# Altium PCB ATS_Unit.PcbDoc
Units mm, origin at the board's own origin, x right, y up, seen from the top; angles counter-clockwise.
Board outline 113 x 55 mm, 2 copper layers (Top Layer, Bottom Layer); 61 components, 50 nets, 316 pads, 298 vias.
Unrouted connection lines stored in the file: 3.
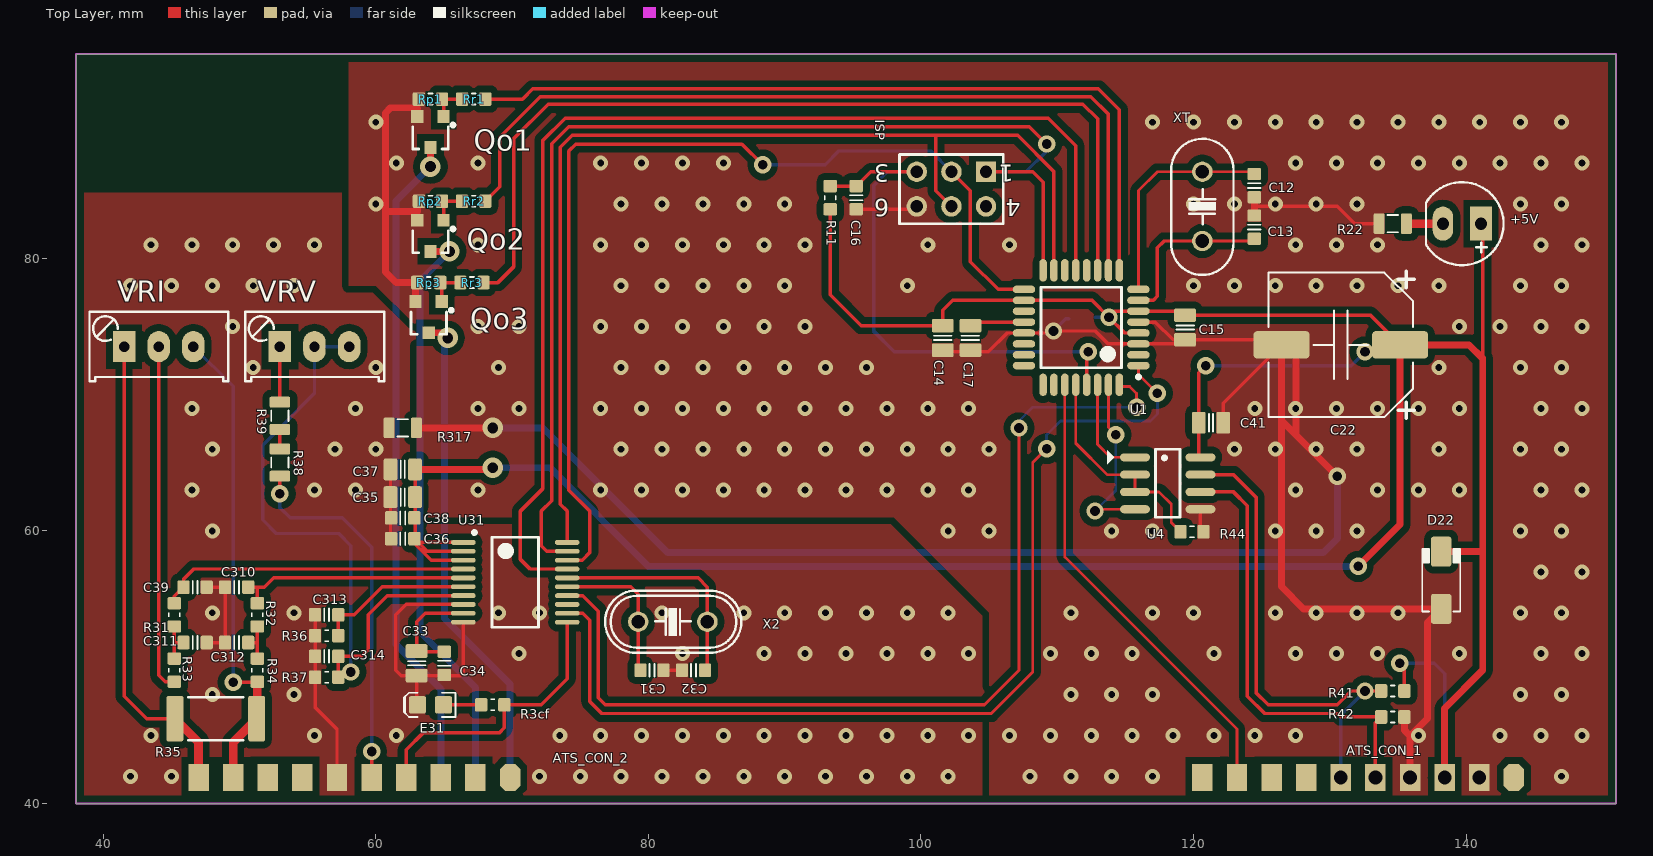
[diagram p0: Top Layer view]
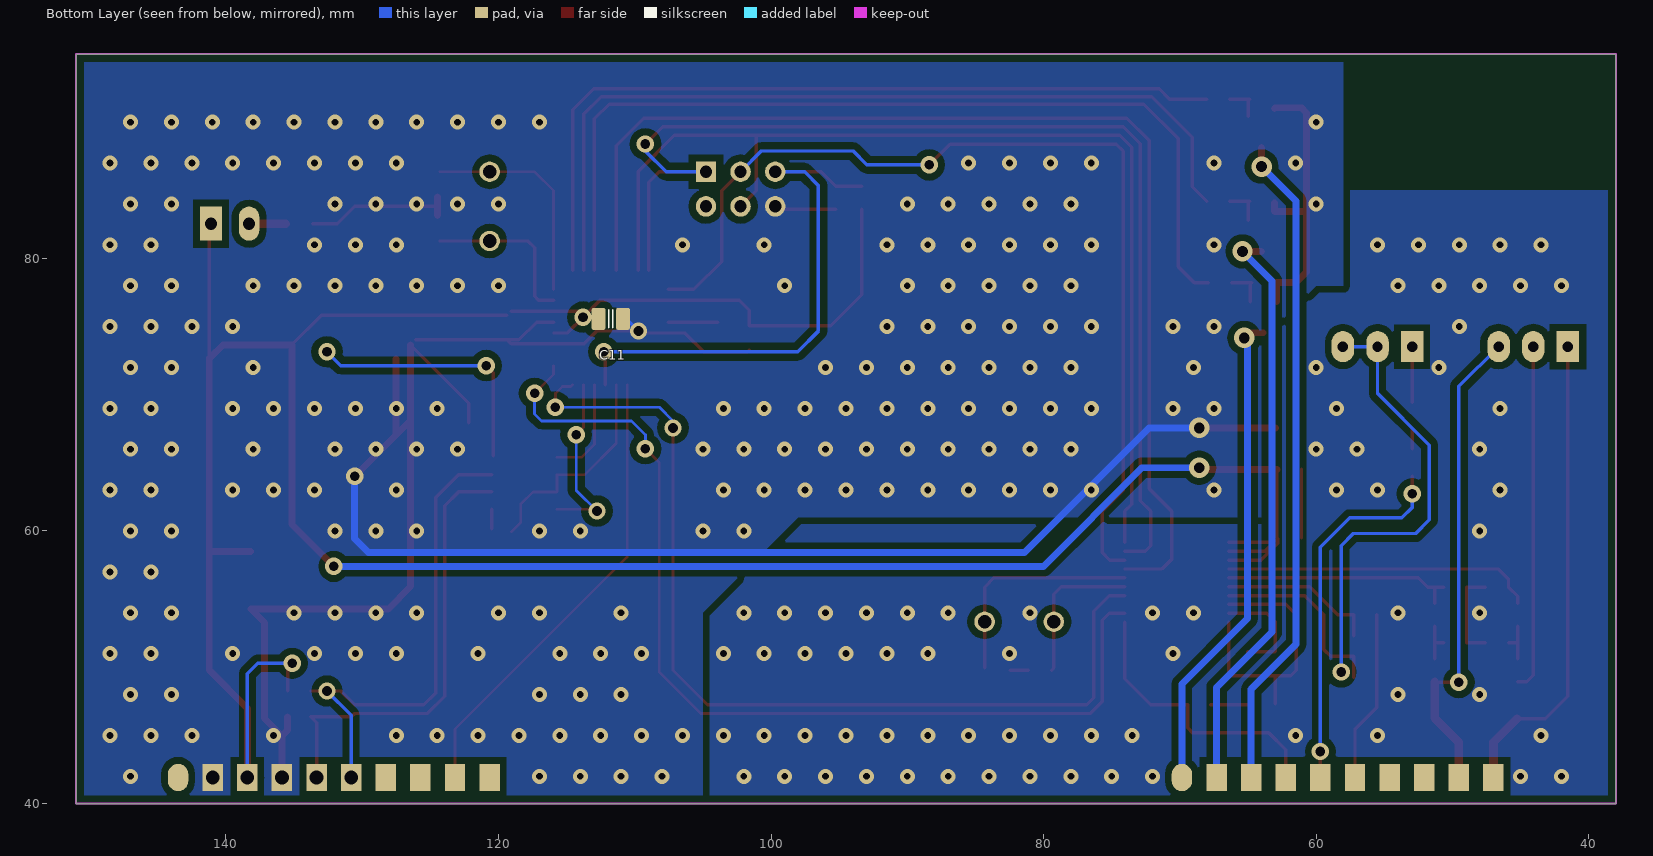
[diagram p1: Bottom Layer view, seen from below]
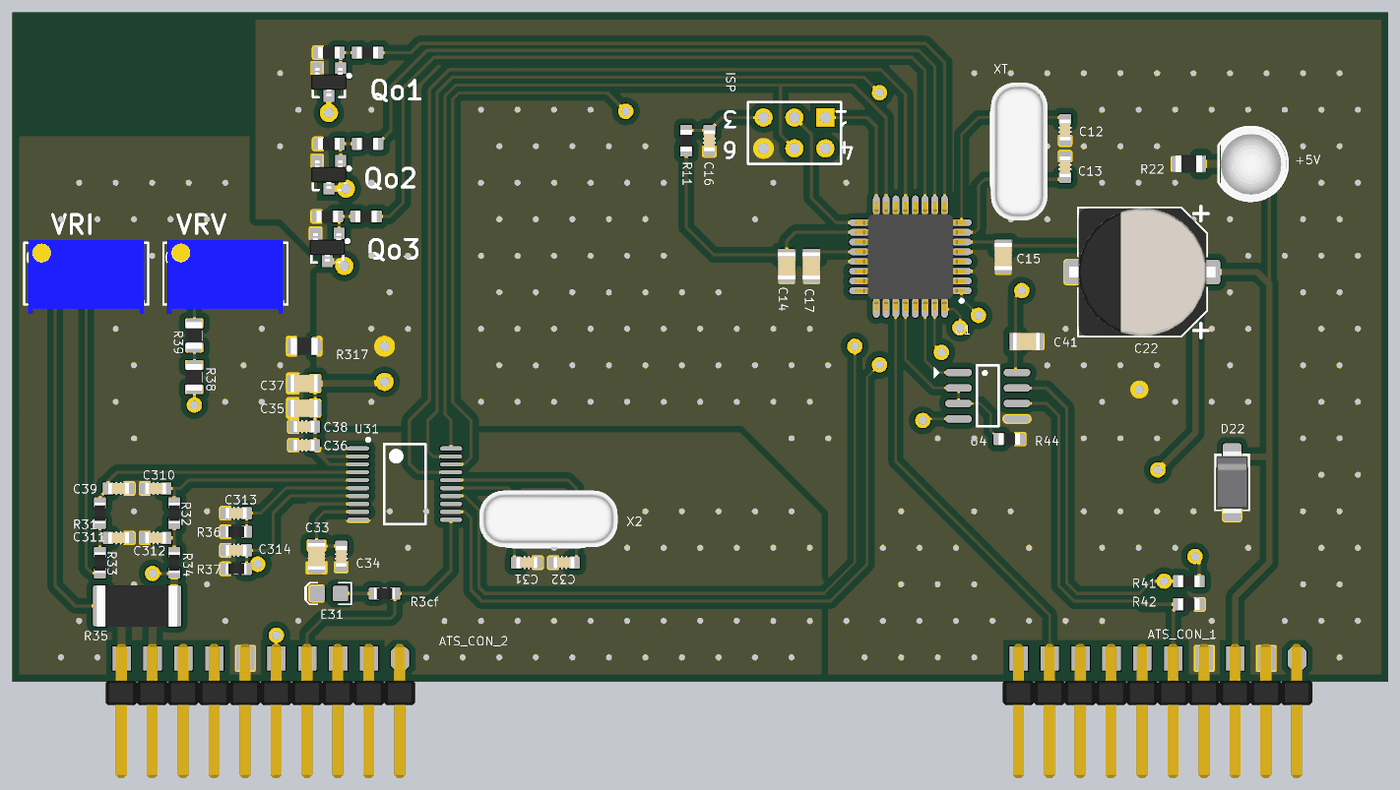
[diagram p2: 3D render of the assembled board from above, using the file's embedded part models]

## Layer stack, top to bottom
Top Solder: solder mask 0.0102, Solder Resist, Dk 3.5
Top Layer: signal copper 0.0356
Dielectric 1: dielectric 0.32, FR-4, Dk 4.8
Bottom Layer: signal copper 0.0356
Bottom Solder: solder mask 0.0102, Solder Resist, Dk 3.5

## Board outline
38,40 151,40 151,95 38,95

## Design rules (kind name [scope] priority, off if disabled: settings)
Clearance [All] p1: gap=0.254 except(0.203: Arc-SMDPad Track-SMDPad SMDPad-SMDPad; 0.508: Arc-Poly Track-Poly SMDPad-Poly THPad-Poly Via-Poly Fill-Poly Poly-Poly)
PlaneConnect [All] p1: planeconnectstyle=Direct reliefexpansion=0.508 reliefentries=4 reliefconductorwidth=0.254 reliefairgap=0.254
PolygonConnect [All] p1: connectstyle=Direct reliefconductorwidth=0.254 reliefentries=4 polygonreliefangle="90 Angle" airgapwidth=0.254
RoutingVias [All] p1: holewidth=0.8 width=1.2 viastyle="Through Hole" minholewidth=0.5 minwidth=1.1 maxholewidth=5 maxwidth=5
SolderMaskExpansion [All] p1: expansion=0.102
Width [All] p1: maxlimit=1.27 minlimit=0.203 preferedwidth=0.635
29 further rules are at their usual default settings.

## Components (designator, comment, footprint, x,y, rotation, side; value= is the part's Value field where it differs from the comment)
+5V "Led" "LED 5mm RED" 139.7,82.55 r180 top
ATS_CON_1 "Header 10X2A" OMC10 143.51,41.91 r180 top
ATS_CON_2 "Header 10X2A" OMC10 69.85,41.91 r180 top
C11 "Cap" CAPC2012N_F#1 111.76,75.565 r180 bottom
C12 "CAP NP" CAPC1608N 124.46,85.344 r270 top
C13 "CAP NP" CAPC1608N 124.46,82.296 r90 top
C14 "Cap" CAPC2012N_F#2 101.6,74.168 r270 top
C15 "Cap" CAPC2012N_F#2 119.38,74.93 r270 top
C16 "CAP NP" CAPC1608N 95.25,84.455 r90 top
C17 "Cap" CAPC2012N_F#2 103.632,74.168 r270 top
C22 "2200uF/35V" CAP_ELEC_SIZE_G 130.81,73.66 r90 top
C31 "CAP NP" CAPC1608N 80.264,49.784 r180 top
C32 "CAP NP" CAPC1608N 83.312,49.784 r0 top
C33 "Cap" CAPC2012N_F#3 62.992,50.292 r270 top
C34 "CAP NP" CAPC1608N 65.024,50.292 r90 top
C35 "Cap" CAPC2012N_F#3 61.976,62.484 r180 top
C36 "CAP NP" CAPC1608N 61.976,59.436 r0 top
C37 "Cap" CAPC2012N_F#3 61.976,64.516 r180 top
C38 "CAP NP" CAPC1608N 61.976,60.96 r0 top
C39 "CAP NP" CAPC1608N 46.736,55.88 r180 top
C41 "100nF/104" CAPC2012N_F#2 121.285,67.945 r180 top
C310 "CAP NP" CAPC1608N 49.784,55.88 r0 top
C311 "CAP NP" CAPC1608N 46.736,51.816 r180 top
C312 "CAP NP" CAPC1608N 49.784,51.816 r0 top
C313 "CAP NP" CAPC1608N 56.388,53.848 r0 top
C314 "CAP NP" CAPC1608N 56.388,50.8 r0 top
D22 "Diode" DO-214AC 138.176,56.388 r90 top
E31 "Blue" LED-0805-K 64.008,47.244 r180 top
ISP "Header 3X2A" HDR2X3_CEN 104.775,86.36 r180 top
Qo1 "C828" "SOT23 TOP" 64.008,89.281 r180 top
Qo2 "C828" "SOT23 TOP" 64.008,81.661 r180 top
Qo3 "C828" "SOT23 TOP" 63.881,75.692 r180 top
R3cf "Res" 0603ESDA 68.58,47.244 r180 top
R11 "Res" RESC1608N_ZERO 93.345,84.455 r270 top
R22 "Res_0805_1k" RESC2012N_F#1 134.62,82.55 r180 top
R31 "Res" 0603ESDA 45.212,53.848 r90 top
R32 "Res" 0603ESDA 51.308,53.848 r90 top
R33 "Res" 0603ESDA 45.212,49.784 r90 top
R34 "Res" 0603ESDA 51.308,49.784 r90 top
R35 "0.002R" RESC6332N 48.26,46.228 r180 top
R36 "Res" 0603ESDA 56.388,52.324 r0 top
R37 "Res" 0603ESDA 56.388,49.276 r0 top
R38 "Res" RESC2012N_F#2 52.959,65.024 r90 top
R39 "Res" RESC2012N_F#2 52.959,68.453 r90 top
R41 "1k" RESC1608N_ZERO 134.62,48.26 r0 top
R42 "1k" RESC1608N_ZERO 134.62,46.355 r180 top
R44 "330R" RESC1608N_ZERO 119.888,59.944 r180 top
R317 "Res" RESC2012N_F#2 61.976,67.564 r180 top
Rp1 "Res" RESC1608N_ZERO 64.008,91.694 r0 top
Rp2 "Res" RESC1608N_ZERO 64.008,84.201 r0 top
Rp3 "Res" RESC1608N_ZERO 63.881,78.232 r0 top
Rr1 "Res" RESC1608N_ZERO 67.183,91.694 r180 top
Rr2 "Res" RESC1608N_ZERO 67.183,84.201 r180 top
Rr3 "Res" RESC1608N_ZERO 67.056,78.232 r180 top
U1 "ATmega88PA" 32PIN 111.76,74.93 r180 top
U4 "MAX485" SO-8 118.11,63.5 r0 top
U31 "ADE7753" TSSOP-20 70.231,56.236 r0 top
VRI "1K" VR1 41.529,73.533 r0 top
VRV "100K" VR1 52.959,73.533 r0 top
X2 "3.5795Mhz" XT2 81.788,53.34 r180 top
XT "16MHz" XT2 120.65,83.82 r90 top

## Footprints (in the part's own frame and the unit in brackets; to place one, negate y for a bottom-side part, rotate by r counter-clockwise, add the part's x,y. Pads: shape width x height; smd on the part's side, far side on the other; paste and mask are expansions set on the pad)
32PIN [mm]
  oval 1.65x0.55 smd: 1(-4.2,2.8) 2(-4.2,2) 3(-4.2,1.2) 4(-4.2,0.4) 5(-4.2,-0.4) 6(-4.2,-1.2) 7(-4.2,-2) 8(-4.2,-2.8) 17(4.2,-2.8) 18(4.2,-2) 19(4.2,-1.2) 20(4.2,-0.4) 21(4.2,0.4) 22(4.2,1.2) 23(4.2,2) 24(4.2,2.8)
  oval 0.55x1.65 smd: 9(-2.8,-4.2) 10(-2,-4.2) 11(-1.2,-4.2) 12(-0.4,-4.2) 13(0.4,-4.2) 14(1.2,-4.2) 15(2,-4.2) 16(2.8,-4.2) 25(2.8,4.2) 26(2,4.2) 27(1.2,4.2) 28(0.4,4.2) 29(-0.4,4.2) 30(-1.2,4.2) 31(-2,4.2) 32(-2.8,4.2)
  silkscreen extent -4.33,-2.95 2.95,3.75, body extent -4.5,-4.5 4.5,4.5, height 1.6
0603ESDA [mm] "Chip ESD suppressor, Body 1.6x0.8mm, 0603, IPC Medium Density"
  round 0.254 on Mech14: 0(0,0)
  rrect25% 0.9x1 smd: 1(-0.85,0) 2(0.85,0)
  Top Layer pour cut-out: -0.4,0.6 0.4,0.6 0.4,-0.6 -0.4,-0.6
  silkscreen extent -0.15,-0.41 0.15,0.41, body extent -0.85,-0.45 0.85,0.45, height 0.79
CAP_ELEC_SIZE_G [mm] "Capacitor, polarized, aluminum can; 10.0x10.2mm DxH"
  round 0.635 on Mech14: 0(0,0)
  rrect25% 2x4.1 smd: 1(0,-4.35) 2(0,4.35)
  silkscreen extent -5.4,-5.4 5.4,5.3, body extent -5.25,-6 5.25,6, height 10.5
CAPC1608N [mm] "Chip Capacitor, Body 1.6x0.8mm, 0603, IPC Medium Density"
  round 0.254 on Mech14: 0(0,0)
  rrect25% 0.9x1 smd: 1(-0.85,0) 2(0.85,0)
  Top Layer pour cut-out: -0.4,0.6 0.4,0.6 0.4,-0.6 -0.4,-0.6
  silkscreen extent -0.18,-0.48 0.18,0.48, body extent -0.85,-0.45 0.85,0.45, height 0.89
CAPC2012N_F#1 [mm] "Chip Capacitor, Body 2.0x1.2mm, 0805, IPC Medium Density, for Flex circuits"
  round 0.254 on Mech14: 0(0,0)
  rrect25% 1.2x1.4 on Bottom Solder: 1(-0.9,0) 1(0.9,0)
  rrect25% 1x1.6 smd paste-1: 1(-0.9,0) 2(0.9,0)
  rrect25% 1x1.4 on Bottom Paste: 1(-0.9,0) 1(0.9,0)
  Top Layer pour cut-out: -0.4,0.8 0.4,0.8 0.4,-0.8 -0.4,-0.8
  silkscreen extent -0.15,-0.65 0.15,0.65, body extent -1.1,-0.72 1.1,0.73, height 1.34
CAPC2012N_F#2 [mm] "Chip Capacitor, Body 2.0x1.2mm, 0805, IPC Medium Density, for Flex circuits"
  round 0.254 on Mech14: 0(0,0)
  rrect25% 1.2x1.4 on Top Solder: 1(-0.9,0) 1(0.9,0)
  rrect25% 1x1.6 smd paste-1: 1(-0.9,0) 2(0.9,0)
  rrect25% 1x1.4 on Top Paste: 1(-0.9,0) 1(0.9,0)
  Top Layer pour cut-out: -0.4,0.8 0.4,0.8 0.4,-0.8 -0.4,-0.8
  silkscreen extent -0.15,-0.65 0.15,0.65, body extent -1.1,-0.72 1.1,0.73, height 1.34
CAPC2012N_F#3 [mm] "Chip Capacitor, Body 2.0x1.2mm, 0805, IPC Medium Density, for Flex circuits"
  round 0.254 on Mech14: 0(0,0)
  rrect50% 1.2x1.4 on Top Solder: 1(-0.9,0) 1(0.9,0)
  rrect25% 1x1.6 smd paste-1: 1(-0.9,0) 2(0.9,0)
  rrect50% 1x1.4 on Top Paste: 1(-0.9,0) 1(0.9,0)
  Top Layer pour cut-out: -0.4,0.8 0.4,0.8 0.4,-0.8 -0.4,-0.8
  silkscreen extent -0.15,-0.65 0.15,0.65, body extent -1.1,-0.72 1.1,0.73, height 1.34
DO-214AC [mm] "JEDEC DO214 variation AC. SMA"
  round 0.508 on Mech14: 0(0,0)
  rrect25% 2.2x1.5 smd: A(-2.1,0) K(2.1,0)
  silkscreen extent -2.3,-1.4 2.3,1.4, body extent -2.6,-1.3 2.6,1.3, height 2.42
HDR2X3_CEN [mm] "Connector; Header; 3x2 Position"
  rect 1.5x1.5 hole 0.9: 1(0,0)
  round 1.5 hole 0.9: 2(2.54,0) 3(5.08,0) 4(0,2.54) 5(2.54,2.54) 6(5.08,2.54)
  silkscreen extent -1.27,-1.27 6.35,3.81
"LED 5mm RED" [mm]
  rect 1.6x2.5 hole 0.9: A(-1.397,0)
  oval 1.5x2.5 hole 0.9: K(1.397,0)
  silkscreen extent -3.04,-3.05 2.64,3.04, body extent -2.94,-2.97 2.48,3.05, height 12.31
LED-0805-K [mil]
  round 20 on Mech14: 0(0,0)
  rrect25% 50x50 smd: A(-37.5,0) K(37.5,0)
  Top Layer pour cut-out: -15,30 15,30 15,-30 -15,-30
  silkscreen extent -72,-35 77,35, body extent -39,-25 39,25, height 31
OMC10 [mm]
  oct 1.5x2 smd: 1(0,0)
  rect 1.5x2 smd: 2(2.54,0) 3(5.08,0) 4(7.62,0) 5(10.16,0) 6(12.7,0) 7(15.24,0) 8(17.78,0) 9(20.32,0) 10(22.86,0)
  oval 1.5x2 smd far side: 11(0,0)
  rect 1.5x2 smd far side: 12(2.54,0) 13(5.08,0) 14(7.62,0) 15(10.16,0) 16(12.7,0) 17(15.24,0) 18(17.78,0) 19(20.32,0) 20(22.86,0)
  body extent -1.24,-1.18 24.16,9.82, height 2.33
RESC1608N_ZERO [mm] "Chip Resistor, Body 1.6x0.8mm, 0603, IPC Medium Density"
  round 0.254 on Mech14: 0(0,0)
  rrect25% 0.9x1 smd: 1(-0.85,0) 2(0.85,0)
  Top Layer pour cut-out: -0.4,0.6 0.4,0.6 0.4,-0.6 -0.4,-0.6
  silkscreen extent -0.15,-0.41 0.15,0.41, body extent -0.87,-0.47 0.88,0.48, height 0.54
RESC2012N_F#1 [mm] "Chip Resistor, Body 2.0x1.2mm, 0805, IPC Medium Density"
  round 0.254 on Mech14: 0(0,0)
  rrect25% 1x1.3 on Top Solder: 1(-1,0) 1(1,0)
  rrect25% 0.8x1.5 smd paste-1: 1(-1,0) 2(1,0)
  rrect25% 0.8x1.3 on Top Paste: 1(-1,0) 1(1,0)
  Top Layer pour cut-out: -0.6,0.75 0.6,0.75 0.6,-0.75 -0.6,-0.75
  silkscreen extent -0.38,-0.64 0.38,0.64, body extent -1.1,-0.67 1.1,0.68, height 0.69
RESC2012N_F#2 [mm] "Chip Resistor, Body 2.0x1.2mm, 0805, IPC Medium Density"
  round 0.254 on Mech14: 0(0,0)
  rrect50% 1x1.3 on Top Solder: 1(-1,0) 1(1,0)
  rrect25% 0.8x1.5 smd paste-1: 1(-1,0) 2(1,0)
  rrect50% 0.8x1.3 on Top Paste: 1(-1,0) 1(1,0)
  Top Layer pour cut-out: -0.6,0.75 0.6,0.75 0.6,-0.75 -0.6,-0.75
  silkscreen extent -0.38,-0.64 0.38,0.64, body extent -1.1,-0.67 1.1,0.68, height 0.69
RESC6332N [mm] "Chip Resistor, Body 6.3x3.2mm, 2512, IPC Medium Density"
  round 1 on Mech14: 0(0,0)
  rrect25% 1.25x3.35 smd: 1(-3,0) 2(3,0)
  silkscreen extent -2,-1.58 2,1.58, body extent -3.3,-1.7 3.3,1.7, height 0.69
SO-8 [mm] "8-Pin Small Outline Integrated Circuit 1.27 mm Pitch, IPC Medium Density"
  oval 2.2x0.6 smd: 1(-2.4,1.905) 2(-2.4,0.635) 3(-2.4,-0.635) 4(-2.4,-1.905) 5(2.4,-1.905) 6(2.4,-0.635) 7(2.4,0.635) 8(2.4,1.905)
  silkscreen extent -4.44,-2.5 0.9,2.5, body extent -1.95,-2.45 1.95,2.45, height 1.75
"SOT23 TOP" [mm]
  rect 0.9x0.95 smd: 1(-0.965,-1.143) 2(0,1.143) 3(0.965,-1.143)
  silkscreen extent -1.77,-0.63 1.3,1.25, body extent -1.46,-1.17 1.46,1.17, height 1
TSSOP-20 [mm] "TSOP, 20-Leads, Body 6.5x4.4mm, Pitch 0.65mm, IPC Low Density"
  oval 1.8x0.35 smd: 1(-3.81,2.925) 2(-3.81,2.275) 3(-3.81,1.625) 4(-3.81,0.975) 5(-3.81,0.325) 6(-3.81,-0.325) 7(-3.81,-0.975) 8(-3.81,-1.625) 9(-3.81,-2.275) 10(-3.81,-2.925) 11(3.81,-2.925) 12(3.81,-2.275) 13(3.81,-1.625) 14(3.81,-0.975) 15(3.81,-0.325) 16(3.81,0.325) 17(3.81,0.975) 18(3.81,1.625) 19(3.81,2.275) 20(3.81,2.925)
  silkscreen extent -3.12,-3.3 1.7,3.77, body extent -2.25,-3.3 2.25,3.3, height 1.2
VR1 [mil] "Variable Resistor"
  rect 65x90 hole 30: 1(0,0)
  oval 65x90 hole 30: 2(100,0) 3(200,0)
  silkscreen extent -100,-100 301,100, body extent -88,-130 288,110, height 455
XT2 [mm] "Footpin for Crystal 2 pin"
  round 1.5 hole 1: 1(-2.54,0) 2(2.54,0)
  silkscreen extent -5.03,-2.29 4.96,2.29, body extent -5.93,-2.36 5.42,2.29, height 3.5

## Part data
ATS_CON_1 ATS_CON_2: "Header, 10-Pin, Dual row"
C22: library part CP4, "Cap 1000uF/16V - 220uF/50V"
C41: library part "CAP NP"
E31: library part LED_SMD_Blue_0805_100mcd, "LED 0805 SMD Blue 100mcd 470nm"
ISP: "Header, 3-Pin, Dual row"
Qo1 Qo2 Qo3: library part NPN, "Transistor C828 C1815...."
R22: library part Res
R35: library part R, "Resistor 1/4W"
R41 R42 R44: library part Res, "Tro dan"
U1: library part ATmega48/168/328, "ATmega48/168/328"
U4: "RS232 - RS485 (Same sn75176)"
U31: "Single-Phase Multifunction Metering IC with di/dt Sensor Interface"
VRI VRV: library part VR, "Var Resistor"
X2: library part XT2, "Crystal For all Crystal 2pin."
XT: library part Crystal

## Via types
v1: diameter 1.1, hole 0.5, Top Layer to Bottom Layer, tented both sides, 267 vias
v2: diameter 1.27, hole 0.711, Top Layer to Bottom Layer, 21 vias
v3: diameter 1.5, hole 0.8, Top Layer to Bottom Layer, 5 vias
v4: diameter 1.5, hole 1, Top Layer to Bottom Layer, 5 vias

## Nets (pads, with @x,y where several pads share a name; then routed paths per layer and width w, separated by ;. In a path a pad name is that pad's centre, name@x,y a point inside that pad or via, vN(x,y) a via of type N, cw(c..) or ccw(c..) an arc to the next point about the centre after c; other vN are vias at no path point)
+3V3: ATS_CON_1.7 ATS_CON_1.17
+5V: +5V.A ATS_CON_1.3 ATS_CON_1.13 C11.1@112.66,75.565 C14.1@101.6,75.068 C15.1@119.38,75.83 C22.1 C35.1@62.876,62.484 C36.2 C37.1@62.876,64.516 C38.2 C41.2 D22.K R11.2 R41.2 U1.4 U1.6 U1.18 U4.8 U31.1 U31.2 U31.3 | length 245.6
  Top Layer w0.254: C36.2@62.876,59.486 62.876,62.484 C37.1@62.876,64.516 ; U31.3 64.059,57.861 62.826,59.094 C36.2 C36.2@63.101,59.161 ; U31.2 63.751,58.511 C36.2@63.101,59.161 ; U31.1 C36.2@63.101,59.161 ; R11.2 93.345,77.343 95.62,75.068 101.6,75.068 101.6,76.2 102.33,76.93 U1.18 112.554,76.93 v2(113.792,75.692) ; U1.4 114.954,74.53 v2(113.792,75.692) ; C15.1@119.08,76.13 U1.6 114.23,76.13 v2(113.792,75.692) ; C15.1@119.38,75.83 132.99,75.83 C22.1 ; U4.8@120.385,65.53 C41.2 120.385,71.617 v2(120.904,72.136) ; v2(135.128,50.292) 135.47,49.95 R41.2 ; +5V.A 141.224,82.423 141.224,72.644
  Top Layer w0.508: C37.1@62.876,64.516 68.453,64.516 v3(68.58,64.643) ; v2(132.08,57.404) 135.16,60.484 C22.1 140.208,73.66 141.224,72.644 141.224,49.784 138.43,46.99 v4(138.43,41.91) ; D22.K 141.156,58.488
  Bottom Layer w0.254: C11.1@112.787,75.692 v2(113.792,75.692) ; v2(120.904,72.136) 131.572,72.136 v2(132.588,73.152) ; v2(135.128,50.292) 137.668,50.292 138.43,49.53 v4(138.43,41.91)
  Bottom Layer w0.508: v3(68.58,64.643) 72.771,64.643 80.01,57.404 v2(132.08,57.404)
+12V_IN: ATS_CON_1.1 ATS_CON_1.11
ADC6: U1.19
ADC7: U1.22
ADE-CLK: ISP.2 U1.17 U31.18 | length 73.9
  Top Layer w0.254: U31.18 75.133,57.861 75.692,58.42 75.692,61.468 74.168,62.992 74.168,87.884 74.676,88.392 86.868,88.392 v2(88.392,86.868) ; ISP.2 103.632,84.963 103.632,79.756 105.658,77.73 U1.17
  Bottom Layer w0.254: v2(88.392,86.868) 92.964,86.868 93.98,87.884 100.711,87.884 ISP.2
ADE-CS: U1.13 U31.17 | length 84.9
  Top Layer w0.254: U31.17 71.313,57.211 70.612,57.912 70.612,61.468 72.263,63.119 72.263,88.673 73.887,90.297 109.347,90.297 111.36,88.284 U1.13
ADE-DIN: ISP.5 U1.15 U31.20 | length 79.8
  Top Layer w0.254: U31.20 74.041,61.468 73.533,61.976 73.533,88.147 74.413,89.027 101.092,89.027 ; ISP.5 101.092,84.963 101.092,89.027 ; U1.15 109.76,86.36 107.093,89.027 101.092,89.027
ADE-DOUT: ISP.1 U1.16 U31.19 | length 85.8
  Top Layer w0.254: U31.19 72.553,58.511 72.136,58.928 72.136,61.468 72.898,62.23 72.898,88.41 74.15,89.662 107.95,89.662 v2(109.22,88.392) ; ISP.1 108.204,86.36 108.96,85.604 U1.16
  Bottom Layer w0.254: ISP.1 107.696,86.36 109.22,87.884 v2(109.22,88.392)
ADE_IRQ: U1.32 U31.14 | length 71.1
  Top Layer w0.203: 104.648,47.244 107.188,49.784 v2(107.188,67.564) ; U1.32 114.678,70.612 115.316,70.612 115.824,70.104 v2(115.824,69.088)
  Top Layer w0.254: U31.14 75.184,55.261 76.327,54.118 76.327,47.752 76.835,47.244 104.648,47.244
  Bottom Layer w0.203: v2(107.188,67.564) 107.188,68.072 108.204,69.088 v2(115.824,69.088)
AGND: ATS_CON_2.6 C31.1 C32.1 C33.2 C34.1 C35.2 C36.1 C37.2 C38.1 C39.1 C310.1 C311.1 C312.1 C313.1 C314.1 E31.K R36.1 R37.1 R317.2 U31.8 U31.10 | length 46
  Top Layer w0.254: C311.1 C312.1 C310.1 C39.1 ; C313.1 R36.1 C314.1 R37.1 55.538,47.078 57.15,45.466 ATS_CON_2.6 ; C36.1@61.076,59.486 C35.2 C37.2 ; E31.K@62.992,47.307 C33.2 ; U31.10 66.421,49.657 66.156,49.392 C33.2 ; U31.8 62.231,54.611 61.468,53.848 61.468,49.784 61.86,49.392 C33.2 ; C31.1 C32.1
  other v1: 42,42 45,42 72,42 75,42 78,42 81,42 84,42 87,42 90,42 93,42 96,42 99,42 102,42 43.5,45 55.5,45 61.5,45 73.5,45 76.5,45 79.5,45 82.5,45 85.5,45 88.5,45 91.5,45 94.5,45 97.5,45 100.5,45 103.5,45 48,48 54,48 70.5,51 82.5,51 88.5,51 91.5,51 94.5,51 97.5,51 100.5,51 103.5,51 48,54 54,54 69,54 72,54 81,54 87,54 90,54 93,54 96,54 99,54 102,54 48,60 46.5,63 55.5,63 58.5,63 48,66 57,66 60,66 46.5,69 58.5,69 51,72 60,72 49.5,75 42,78 45,78 48,78 51,78 54,78 43.5,81 46.5,81 49.5,81 52.5,81 55.5,81
AREF: C17.1@103.632,75.068 U1.20 | length 3.7
  Top Layer w0.254: C17.1@103.894,75.33 U1.20
CF: ATS_CON_2.4 R3cf.1 U31.11 | length 21.2
  Top Layer w0.254: ATS_CON_2.4 62.23,43.942 63.5,45.212 69.088,45.212 69.43,45.554 R3cf.1 72.136,47.244 74.041,49.149 U31.11
CTA: ATS_CON_2.10 R35.2 VRI.1 | length 35.1
  Top Layer w0.254: VRI.1 41.529,47.879 43.18,46.228 R35.2
  Top Layer w0.635: R35.2 46.99,44.498 ATS_CON_2.10
CTB: ATS_CON_2.9 R34.1 R35.1 VRI.3 | length 35.3
  Top Layer w0.254: v2(49.53,48.895) 51.269,48.895 R34.1
  Top Layer w0.635: ATS_CON_2.9 49.53,44.498 R35.1 ; R35.1@51.308,46.276 R34.1
  Bottom Layer w0.254: VRI.3 49.53,70.612 v2(49.53,48.895)
GND: ATS_CON_1.2 ATS_CON_1.4 ATS_CON_1.12 ATS_CON_1.14 C11.2 C12.2 C13.2 C14.2 C15.2 C16.1 C17.2 C22.2 C41.1@122.185,67.945 D22.A ISP.6 Qo1.3 Qo2.3 Qo3.3 R22.2 R42.1 R44.1 R317.1@62.976,67.564 Rp1.1 Rp2.1 Rp3.1 U1.3 U1.5 U1.21 U4.5 | length 209.5
  Top Layer w0.254: C16.1 99.48,83.605 ISP.6 ; C14.2 101.716,73.152 104.94,73.152 106.318,74.53 U1.21 109.582,74.53 v2(109.728,74.676) 112.776,74.676 113.722,73.73 U1.3 119.08,73.73 C15.2 ; U1.5 117.202,75.33 118.502,74.03 C15.2 ; R44.1@120.51,60.172 U4.5 ; C41.1@122.185,67.945 122.185,69.385 C22.2 ; 124.46,83.82 130.556,83.82 131.826,82.55 R22.2 ; C22.2@126.09,74.03 C15.2
  Top Layer w0.508: Qo3.3 Rp3.1@62.916,78.117 ; R317.1@62.976,67.564 v3(68.58,67.564) ; Rp3.1 61.468,78.232 60.706,78.994 60.706,83.312 ; Rp2.1@63.043,84.086 63.043,83.445 60.839,83.445 60.706,83.312 ; 63.043,91.001 62.985,91.059 61.087,91.059 60.706,90.678 60.706,83.312 ; C13.2 124.46,83.82 C12.2 ; C22.2 126.46,68.104 ; 127.508,72.612 127.508,67.056 ; v2(130.556,64.008) 127.508,67.056 ; R42.1 135.47,45.378 135.89,44.958 ; v4(135.89,41.91) 135.89,44.958 ; 126.46,68.104 126.46,55.912 128.084,54.288 D22.A 137.16,53.272 137.16,46.228 135.89,44.958 ; 126.46,68.104 127.508,67.056
  Bottom Layer w0.254: v2(109.728,74.676) 110.617,75.565 C11.2
  Bottom Layer w0.508: v3(68.58,67.564) 72.263,67.564 81.407,58.42 129.54,58.42 130.556,59.436 v2(130.556,64.008)
  other v1: 108,42 111,42 114,42 117,42 147,42 106.5,45 109.5,45 112.5,45 115.5,45 118.5,45 121.5,45 124.5,45 127.5,45 136.5,45 142.5,45 145.5,45 148.5,45 111,48 114,48 117,48 144,48 147,48 109.5,51 112.5,51 115.5,51 121.5,51 127.5,51 130.5,51 133.5,51 139.5,51 145.5,51 148.5,51 111,54 117,54 120,54 126,54 129,54 132,54 135,54 144,54 147,54 145.5,57 148.5,57 102,60 105,60 114,60 117,60 126,60 129,60 132,60 144,60 147,60 67.5,63 76.5,63 79.5,63 82.5,63 85.5,63 88.5,63 91.5,63 94.5,63 97.5,63 100.5,63 103.5,63 127.5,63 133.5,63 136.5,63 139.5,63 145.5,63 148.5,63 78,66 81,66 84,66 87,66 90,66 93,66 96,66 99,66 102,66 105,66 123,66 126,66 129,66 132,66 138,66 144,66 147,66 67.5,69 70.5,69 76.5,69 79.5,69 82.5,69 85.5,69 88.5,69 91.5,69 94.5,69 97.5,69 100.5,69 103.5,69 124.5,69 127.5,69 130.5,69 133.5,69 136.5,69 139.5,69 145.5,69 148.5,69 69,72 78,72 81,72 84,72 87,72 90,72 93,72 96,72 138,72 144,72 147,72 67.5,75 70.5,75 76.5,75 79.5,75 82.5,75 85.5,75 88.5,75 91.5,75 139.5,75 142.5,75 145.5,75 148.5,75 78,78 81,78 84,78 87,78 90,78 99,78 120,78 123,78 126,78 129,78 132,78 135,78 138,78 144,78 147,78 67.5,81 76.5,81 79.5,81 82.5,81 85.5,81 88.5,81 91.5,81 100.5,81 106.5,81 127.5,81 130.5,81 133.5,81 145.5,81 148.5,81 60,84 78,84 81,84 84,84 87,84 90,84 120,84 123,84 126,84 129,84 132,84 144,84 147,84 61.5,87 67.5,87 76.5,87 79.5,87 82.5,87 85.5,87 127.5,87 130.5,87 133.5,87 136.5,87 139.5,87 142.5,87 145.5,87 148.5,87 60,90 117,90 120,90 123,90 126,90 129,90 132,90 135,90 138,90 141,90 144,90 147,90
  other v4: 140.97,41.91
I1N: C312.2 R32.1 R34.2 | length 3
  Top Layer w0.254: C312.2 51.308,51.816 ; R34.2 R32.1
IDC: ATS_CON_1.9 ATS_CON_1.19 U1.27 | length 34.1
  Top Layer w0.203: U1.27 110.56,58.096 123.19,45.466 ATS_CON_1.9
LIVE_IN: ATS_CON_2.5 R38.1@52.959,64.024 | length 27.5
  Top Layer w0.254: v2(52.959,62.738) R38.1@52.959,64.024 ; ATS_CON_2.5@59.436,42.164 ATS_CON_2.5 v2(59.69,43.815)
  Bottom Layer w0.254: v2(52.959,62.738) 52.959,61.722 53.721,60.96 57.531,60.96 59.69,58.801 v2(59.69,43.815)
MCU_RX: U1.30 U4.1 | length 7.5
  Top Layer w0.203: U1.30 112.96,66.364 113.919,65.405 U4.1
MCU_TX: U1.31 U4.4 | length 13.1
  Top Layer w0.203: v2(112.776,61.468) 112.903,61.595 U4.4 ; U1.31 113.76,67.596 v2(114.3,67.056)
  Bottom Layer w0.203: v2(112.776,61.468) 114.3,62.992 v2(114.3,67.056)
Net+5V_2: +5V.K R22.1@135.62,82.55 | length 2.7
  Top Layer w0.635: R22.1@135.62,82.55 +5V.K
NetC31_2: C31.2 U31.15 X2.2 | length 11.1
  Top Layer w0.254: U31.15 78.709,55.911 79.248,55.372 X2.2 79.248,49.95 C31.2
NetC32_2: C32.2 U31.16 X2.1 | length 16.5
  Top Layer w0.254: U31.16 83.647,56.561 84.328,55.88 X2.1 C32.2@84.328,49.95
NetC311_2: C311.2 R31.1 R33.2 | length 3
  Top Layer w0.254: R33.2 R31.1 ; 45.212,51.816 C311.2
NetE31_A: E31.A R3cf.2 | length 2.8
  Top Layer w0.254: E31.A R3cf.2
NetQo1_1: Qo1.1 Rp1.2 Rr1.2 | length 2.6
  Top Layer w0.254: Rp1.2 Rr1.2 ; Qo1.1 Rp1.2@64.973,91.579
NetQo2_1: Qo2.1 Rp2.2 Rr2.2 | length 2.8
  Top Layer w0.254: Rp2.2 Rr2.2 ; Qo2.1 Rp2.2@64.973,84.086
NetQo3_1: Qo3.1 Rp3.2 Rr3.2 | length 2.8
  Top Layer w0.254: Rp3.2 Rr3.2 ; Qo3.1 Rp3.2@64.846,78.117
NetR33_1: R33.1 VRI.2 | length 25.5
  Top Layer w0.254: VRI.2 44.069,49.403 44.538,48.934 R33.1
NetR38_2: R38.2 R39.1@52.959,67.453 | length 1.4
  Top Layer w0.254: R38.2 R39.1@52.959,67.453
NetR39_2: R39.2 VRV.1 | length 4.1
  Top Layer w0.254: R39.2 VRV.1
OC_GC: ATS_CON_2.12 Qo2.2 | length 42.6
  Top Layer w0.508: Qo2.2 v3(65.405,80.518)
  Bottom Layer w0.508: v3(65.405,80.518) 63.246,78.359 63.246,52.578 67.31,48.514 ATS_CON_2.12
OC_MC: ATS_CON_2.13 Qo1.2 | length 48.6
  Top Layer w0.508: v3(64.008,86.741) Qo1.2
  Bottom Layer w0.508: v3(64.008,86.741) 61.468,84.201 61.468,51.689 64.77,48.387 ATS_CON_2.13
OC_SC: ATS_CON_2.11 Qo3.2 | length 35.9
  Top Layer w0.508: Qo3.2 64.897,74.549 v3(65.278,74.168)
  Bottom Layer w0.508: v3(65.278,74.168) 65.024,73.914 65.024,53.594 69.85,48.768 ATS_CON_2.11
REF: C33.1@62.992,51.192 C34.2 U31.9 | length 7.8
  Top Layer w0.254: C33.1@62.992,51.192 62.992,53.34 63.613,53.961 U31.9 ; C33.1@63.042,51.142 C34.2
RELAY_1: Rr1.1 U1.9 | length 59.2
  Top Layer w0.254: Rr1.1 70.762,91.694 71.513,92.444 113.018,92.444 114.56,90.903 U1.9
RELAY_2: Rr2.1 U1.10 | length 63
  Top Layer w0.254: Rr2.1 69.088,85.256 69.088,88.888 72.078,91.879 112.453,91.879 113.76,90.571 U1.10
RELAY_3: Rr3.1 U1.11 | length 67.5
  Top Layer w0.254: Rr3.1 68.961,78.232 70.104,79.375 70.104,88.773 72.644,91.313 111.887,91.313 112.96,90.24 U1.11
RESET: C16.2 ISP.3 R11.1 U1.29 | length 39.9
  Top Layer w0.254: R11.1 C16.2 96.305,86.36 ISP.3 ; U1.29 112.16,73.044 v2(112.268,73.152)
  Bottom Layer w0.254: ISP.3 97.536,86.36 96.52,85.344 96.52,74.676 98.044,73.152 v2(112.268,73.152)
RS485A: ATS_CON_1.5 ATS_CON_1.15 R42.2 U4.6 | length 32.9
  Top Layer w0.254: U4.6 122.936,62.865 123.952,61.849 123.952,47.87 125.213,46.609 130.556,46.609 130.81,46.355 R42.2 133.35,45.935 v4(133.35,41.91)
RS485B: ATS_CON_1.6 ATS_CON_1.16 R41.1 U4.7 | length 36.2
  Top Layer w0.254: U4.7 122.936,64.135 124.587,62.484 124.587,48.133 125.476,47.244 130.556,47.244 131.572,48.26 v2(132.588,48.26) R41.1
  Bottom Layer w0.254: v4(130.81,41.91) 130.81,46.482 v2(132.588,48.26)
RS485D: R44.2 U1.28 U4.2 U4.3 | length 16.2
  Top Layer w0.203: U1.28 111.36,66.44 113.665,64.135 U4.2 U4.3 117.475,62.865 118.364,61.976 118.364,60.618 R44.2
V1N: C310.2 R32.2 U31.5 | length 17.3
  Top Layer w0.254: C310.2 51.308,55.88 ; R32.2 51.308,55.88 ; U31.5 52.497,56.561 51.816,55.88 51.308,55.88
V1P: C39.2 R31.2 U31.4 | length 22.9
  Top Layer w0.254: R31.2 45.212,55.206 C39.2 45.886,56.471 46.626,57.211 U31.4
V2N: C313.2 R36.2 U31.6 | length 11.6
  Top Layer w0.254: R36.2 C313.2 58.42,53.848 60.483,55.911 U31.6
V2P: C314.2 R37.2 U31.7 VRV.2 VRV.3 | length 47.4
  Top Layer w0.254: R37.2 C314.2 58.928,50.8 59.436,51.308 59.436,53.848 60.849,55.261 U31.7
  Bottom Layer w0.254: VRV.3 VRV.2 55.499,70.104 51.689,66.294 51.689,60.833 52.705,59.817 57.277,59.817 58.166,58.928 v2(58.166,49.657)
XTAL1: C12.1 U1.8 XT.2 | length 16.2
  Top Layer w0.203: U1.8 115.96,84.972 117.348,86.36 XT.2 C12.1@124.294,86.36
XTAL2: C13.1 U1.7 XT.1 | length 12.2
  Top Layer w0.254: U1.7 117.062,76.93 117.348,77.216 117.348,80.772 117.856,81.28 XT.1 C13.1@124.294,81.28
"ZERO CROSSING": U1.1 U31.12 | length 72.7
  Top Layer w0.203: 105.156,46.609 108.204,49.657 108.204,65.024 v2(109.22,66.04) ; U1.1 115.96,71.492 v2(117.348,70.104)
  Top Layer w0.254: U31.12 75.184,53.961 75.692,53.453 75.692,47.489 76.572,46.609 105.156,46.609
  Bottom Layer w0.203: v2(109.22,66.04) 109.22,67.056 110.236,68.072 116.84,68.072 117.348,68.58 v2(117.348,70.104)
pads on no net: ATS_CON_1.8 ATS_CON_1.10 ATS_CON_1.18 ATS_CON_1.20 ATS_CON_2.1 ATS_CON_2.2 ATS_CON_2.3 ATS_CON_2.7 ATS_CON_2.8 ATS_CON_2.14 ATS_CON_2.15 ATS_CON_2.16 ATS_CON_2.17 ATS_CON_2.18 ATS_CON_2.19 ATS_CON_2.20 C11.0 C11.1@110.86,75.565 C11.1@112.66,75.565 C12.0 C13.0 C14.0 C14.1@101.6,73.268 C14.1@101.6,75.068 C15.0 C15.1@119.38,74.03 C15.1@119.38,75.83 C16.0 C17.0 C17.1@103.632,73.268 C17.1@103.632,75.068 C22.0 C31.0 C32.0 C33.0 C33.1@62.992,49.392 C33.1@62.992,51.192 C34.0 C35.0 C35.1@61.076,62.484 C35.1@62.876,62.484 C36.0 C37.0 C37.1@61.076,64.516 C37.1@62.876,64.516 C38.0 C39.0 C41.0 C41.1@120.385,67.945 C41.1@122.185,67.945 C310.0 C311.0 C312.0 C313.0 C314.0 D22.0 E31.0 ISP.4 R3cf.0 R11.0 R22.0 R22.1@133.62,82.55 R22.1@135.62,82.55 R31.0 R32.0 R33.0 R34.0 R35.0 R36.0 R37.0 R38.0 R38.1@52.959,64.024 R38.1@52.959,66.024 R39.0 R39.1@52.959,67.453 R39.1@52.959,69.453 R41.0 R42.0 R44.0 R317.0 R317.1@60.976,67.564 R317.1@62.976,67.564 Rp1.0 Rp2.0 Rp3.0 Rr1.0 Rr2.0 Rr3.0 U1.2 U1.12 U1.14 U1.23 U1.24 U1.25 U1.26 U31.13

## Polygon pours and split planes (outlines as drawn)
AGND on Top Layer "Top Layer-No Net" (solid, pour order 14): 38,85 38.169,84.831 58,84.831 58,78 60,78 63,75 63,61 98,61 105,54 105,40 38,40
GND on Top Layer "Top Layer-No Net" (solid, pour order 8): 151,40 151,95 58,95 58,78 60,78 63,75 63,74 63,61 98,61 105,54 105,40
AGND on Bottom Layer "Top Layer-No Net" (solid, pour order 12): 105,40 38,40 38,85 57.744,85 58,84.744 58,78 60,78 64.931,73.069 65.912,73.069 65.912,61.088 66,61 66.108,60.892 98.108,60.892 105,54
GND on Bottom Layer "Top Layer-No Net" (solid, pour order 10): 58,95 58,78 60,78 63,75 63,61 98,61 105,54 105,40 151,40 151,95

## Keep-outs
Keep-Out Layer:
  the board outline again, w0.15

## Dimensions
35,95 to 34,40 on Top Overlay
38,31 to 151,32 on Top Overlay

## Text inside footprints (layer, text, board x,y; h text height)
ISP: Top Overlay "6" at 97.663,84.328 h1.27 r180; Top Overlay "3" at 97.663,86.868 h1.27 r180; Top Overlay "1" at 106.807,86.868 h1.27 r180; Top Overlay "4" at 107.315,84.328 h1.27 r180